# Allegro board SIX-lianxi - forstu.brd

Outline 67.6 x 42.35 mm; copper layers: TOP, ART03, GND04, PWR05, BOTTOM. Coordinates in mm from the lower left corner of the outline.
Outline path: 0,20.35 0.01,20.35 arc(2.01,22.35) 0.01,24.35 0.01,42.09 arc(0.08,42.27) 0.26,42.35 50.6,42.35 arc(50.78,42.27) 50.86,42.09 50.86,38.85 arc(51.35,38.35) 51.85,38.85 51.85,42.09 arc(51.93,42.27) 52.11,42.35 67.35,42.35 arc(67.53,42.27) 67.6,42.09 67.6,24.35 arc(65.61,22.41) 67.49,20.35 67.6,20.34 67.6,0.25 arc(67.53,0.07) 67.35,0 0.25,0 arc(0.07,0.07) 0,0.25 0,20.35

## Design rules (mm)
net group ADDR: nets DRAM_SDCLK0_N DRAM_SDCLK0_P
net group CLK1: nets CLK1_N CLK1_P
net group SD1_CLK: nets N98008264 SD1_CLK
net group SD2_CLK: nets N300600 SD2_CLK
net group SD2_CMD: nets N300873 SD2_CMD
net group SD2_NRST: nets N300588 SD2_NRST
net group USB_OTG1_D: nets USB_OTG1_DN USB_OTG1_DP
net group USB_OTG2_D: nets USB_OTG2_DN USB_OTG2_DP
net group DATA0-7: nets DRAM_DATA0 DRAM_DATA1 DRAM_DATA2 DRAM_DATA3 DRAM_DATA4 DRAM_DATA5 DRAM_DATA6 DRAM_DATA7 DRAM_DQM0

## Placement (name value [footprint] x y rotation side)
C1  22UF  [C0603]  34.33 18.6 90 bottom
C2  0.22uF  [C0402]  44.11 24.19 180 bottom
C3  0.22uF  [C0402]  44.87 25.58 0 bottom
C4  0.22uF  [C0402]  42.2 23.8 90 bottom
C5  0.22uF  [C0402]  42.2 25.84 90 bottom
C8  0.22uF  [C0402]  42.97 21.39 270 bottom
C9  0.22uF  [C0402]  46.27 23.42 90 bottom
C10  0.22uF  [C0402]  44.36 22.18 270 bottom
C13  0.22uF  [C0402]  46.27 25.46 270 bottom
C14  0.22uF  [C0402]  50.59 32.19 90 bottom
C16  0.22uF  [C0402]  50.71 27.23 0 bottom
C18  0.22uF  [C0402]  47.79 24.82 0 bottom
C19  0.22uF  [C0402]  53.33 24.34 0 bottom
C20  820pF  [C0402]  34.71 22.92 180 bottom
C21  18PF  [C0402]  34.71 20.38 0 bottom
C22  18PF  [C0402]  34.71 22.15 180 bottom
C23  0.22uF  [C0402]  40.43 23.8 90 bottom
C25  0.22uF  [C0402]  40.43 20.76 90 bottom
C26  1.0UF  [C0402]  54.5 26.9 0 top
C28  0.1uF  [C0402]  50.71 26.47 0 bottom
C29  1.0UF  [C0402]  54.5 26.14 0 top
C30  18PF  [C0402]  35.22 14.79 90 top
C31  18PF  [C0402]  34.2 14.79 90 top
C32  0.22uF  [C0402]  39.66 18.85 270 bottom
C33  18PF  [C0402]  38.78 32.69 270 bottom
C34  18PF  [C0402]  39.16 34.09 0 bottom
C35  0.22uF  [C0402]  44.87 26.47 0 bottom
C36  0.22uF  [C0402]  41.32 26.22 270 bottom
C37  0.1uF  [C0402]  46.52 27.36 180 bottom
C39  18PF  [C0402]  38.78 32.69 90 top
C40  18PF  [C0402]  39.16 34.09 180 top
C41  0.1uF  [C0402]  62.78 23.04 270 top
C42  0.1uF  [C0402]  58.84 23.04 90 top
C43  18PF  [C0402]  53.63 32.19 90 top
C44  18PF  [C0402]  55.13 22.26 90 top
C45  18PF  [C0402]  55.13 24.41 270 top
C46  18PF  [C0402]  50.43 34.42 180 top
C47  0.22uF  [C0402]  59.68 4.96 45 bottom
C48  0.22uF  [C0402]  55.29 14.28 45 top
C49  0.22uF  [C0402]  49.82 21.14 0 bottom
C50  0.22uF  [C0402]  48.45 14.66 270 top
C51  10uF  [C0603]  63.03 6.91 45 bottom
C55  0.22uF  [C0402]  41.32 22.15 90 bottom
C56  0.22uF  [C0402]  45.51 19.77 270 bottom
C57  0.22uF  [C0402]  46.55 21.16 0 bottom
C58  22UF  [C0603]  65.45 10.6 45 bottom
C59  0.22uF  [C0402]  62.02 7.55 45 bottom
C60  0.22uF  [C0402]  58.23 3.54 225 bottom
C61  0.22uF  [C0402]  53.94 9.53 225 bottom
C62  0.22uF  [C0402]  56.05 13.77 225 bottom
C63  0.22uF  [C0402]  63.54 9.07 225 bottom
C64  0.22uF  [C0402]  56.78 2.09 225 bottom
C65  0.22uF  [C0402]  51.48 9.07 45 bottom
C66  0.22uF  [C0402]  53 10.6 45 bottom
C67  0.22uF  [C0402]  57.57 15.3 225 bottom
C68  0.22uF  [C0402]  59.2 16.95 225 bottom
C69  0.22uF  [C0402]  58.59 7.29 45 bottom
C70  0.1uF  [C0402]  60.49 4.5 225 bottom
C71  4.7uF  [C0402]  61.76 3.23 225 bottom
C72  2.2pF  [C0402]  58.59 11.87 225 bottom
C74  0.1uF  [C0402]  58.97 2.98 225 bottom
C75  2.2pF  [C0402]  63.03 12.76 45 bottom
C77  4.7uF  [C0402]  21 19.36 90 bottom
C78  0.1uF  [C0402]  20.61 17.45 0 bottom
C80  0.1uF  [C0402]  21.5 21.39 180 bottom
C83  4.7uF  [C0402]  18.58 18.85 270 bottom
C84  0.1uF  [C0402]  23.54 20.88 270 bottom
C85  0.1uF  [C0402]  25.82 19.11 90 bottom
C86  0.1uF  [C0402]  25.82 17.07 90 bottom
C87  0.1uF  [C0402]  19.98 15.93 270 bottom
C88  1.0UF  [C0402]  20.87 15.93 270 bottom
C96  10uF  [C0603]  17.95 9.2 270 top
C97  0.1uF  [C0402]  18.96 9.58 270 top
C98  22UF  [C0603]  24.81 4.75 90 top
C99  10uF  [C0603]  16.69 9.19 270 top
C100  0.1uF  [C0402]  25.82 5.14 90 top
C101  0.1uF  [C0402]  25.44 9.71 0 top
C102  1000pF  [C0402]  25.95 7.29 90 top
C103  10uF  [C0603]  3.34 8.56 180 top
C104  0.1uF  [C0402]  3.72 9.58 180 top
C105  4.7uF  [C0402]  4.61 13.64 0 top
C106  0.1uF  [C0402]  4.61 14.41 0 top
C107  10uF  [C0603]  10.87 22.22 180 top
C108  10uF  [C0603]  10.89 20.96 180 top
C109  0.1uF  [C0402]  11.27 19.94 180 top
C110  22UF  [C0603]  3.72 19.87 0 top
C111  0.1uF  [C0402]  4.1 18.85 0 top
C112  10uF  [C0603]  3.09 5.52 270 top
C113  0.1uF  [C0402]  4.1 5.9 270 top
C114  4.7uF  [C0402]  9.82 5.77 270 top
C115  0.1uF  [C0402]  10.58 5.77 270 top
C116  0.22uF  [C0402]  8.68 19.11 270 top
C117  0.022UF  [C0402]  10.45 4.25 0 top
C118  1000pF  [C0402]  4.36 3.74 180 top
C119  0.1uF  [C0402]  8.68 17.07 90 top
C120  1000pF  [C0402]  10.12 25.63 270 top
C122  1000pF  [C0402]  11.72 11.23 180 top
C123  0.1uF  [C0402]  11.9 25.63 270 top
C130  1.0UF  [C0402]  9.06 10.22 180 top
C131  10uF  [C0603]  34.33 9.33 270 top
C132  10uF  [C0603]  35.6 9.33 270 top
C133  0.1uF  [C0402]  36.62 9.71 270 top
C134  22UF  [C0603]  42.59 4.88 90 top
C135  0.1uF  [C0402]  43.6 5.26 90 top
C140  0.1uF  [C0402]  43.22 9.83 0 top
C141  1000pF  [C0402]  43.73 7.42 90 top
C142  1.0UF  [C0402]  3.6 34.98 270 bottom
C143  0.1uF  [C0402]  4.36 34.98 270 bottom
C144  0.1uF  [C0402]  36.24 35.62 270 bottom
C145  1.0UF  [C0402]  35.47 35.62 270 bottom
C146  47uF  [C0805]  34.2 36.25 270 bottom
C148  0.1uF  [C0402]  36.24 35.62 270 top
C149  1.0UF  [C0402]  35.47 35.62 270 top
C150  22UF  [C0603]  34.46 36 270 top
C152  0.1uF  [C0402]  61.89 32.06 270 top
C154  0.1uF  [C0402]  62.78 32.06 270 top
C156  0.1uF  [C0402]  64.81 32.06 270 bottom
C158  0.1uF  [C0402]  64.05 32.06 270 bottom
C159  0.1uF  [C0402]  22.9 15.93 270 bottom
D1  RB521S30T1G  [SOD523]  52.85 26.01 90 bottom
D2  RB521S30T1G  [SOD523]  54.12 26.01 90 bottom
D3  RB521S-30  [SOD523]  11.72 12.37 180 top
D5  RB521S-30  [SOD523]  8.93 12.37 0 top
J1  SODIMM_EDGE FINGERS  [SODIMM-200PINS]  65.45 40.83 180 top
L1  1uH  [IND_4020]  18.33 5.26 0 top
L2  1uH  [IND_4020]  5.37 27.36 180 top
L3  1uH  [IND_4020]  35.98 5.39 0 top
NOREF  -  [unnamed]  65.6 36.35 0 top
NOREF#2  -  [unnamed]  2.01 36.35 0 top
Q1  RYU002N05  [SOT323-3]  55.49 31.98 90 bottom
Q2  RYU002N05  [SOT323-3]  30.52 7.17 0 bottom
Q3  2SK3018  [SOT323-3]  27.98 7.17 180 top
Q4  2SK3018  [SOT323-3]  30.52 7.17 180 top
Q5  2SK3018  [SOT323-3]  6.01 17.07 90 top
Q6  2SK3018  [SOT323-3]  6.01 17.07 270 bottom
Q8  2SK3018  [SOT323-3]  45.51 7.29 180 top
R1  1K  [R0402]  55.26 26.01 270 bottom
R2  0  [R0402]  34.71 24.19 180 top
R3  10  [R0402]  34.71 22.03 180 top
R4  10  [R0402]  34.71 23.04 180 top
R5  0  [R0402]  34.71 19.87 180 top
R6  10  [R0402]  34.71 21.26 180 bottom
R7  0  [R0402]  34.71 25.18 180 top
R9  10K  [R0402]  34.71 17.33 0 top
R10  10K  [R0402]  34.71 18.85 0 top
R11  10  [R0402]  34.71 16.31 180 top
R12  10  [R0402]  39.66 32.69 90 bottom
R13  10  [R0402]  39.66 32.69 90 top
R14  10K  [R0402]  47.67 32.19 90 bottom
R15  1.5K  [R0402]  63.67 23.04 90 top
R16  0/NC  [R0402]  60.75 23.04 90 top
R17  1K  [R0402]  59.73 23.04 270 top
R18  100K  [R0402]  53.33 23.45 0 bottom
R19  10K  [R0402]  49.7 32.19 90 bottom
R20  1K  [R0402]  50.71 32.19 270 top
R21  1M/NC  [R0402]  51.73 32.19 90 top
R22  499  [R0402]  49.7 32.16 270 top
R23  1M  [R0402]  56.56 32.19 270 top
R24  2.2M  [R0402]  54.52 32.19 90 top
R25  0/NC  [R0402]  52.75 32.19 90 top
R26  0  [R0402]  55.54 32.19 90 top
R27  0/NC  [R0402]  56.56 36.25 90 top
R28  0  [R0402]  56.56 34.22 270 top
R29  10K  [R0402]  44.64 14.58 270 bottom
R30  10K  [R0402]  46.65 14.66 270 bottom
R31  240  [R0402]  60.62 3.36 135 top
R32  240  [R0402]  61.38 4.12 315 top
R33  10K  [R0402]  41.65 17.76 180 bottom
R34  240  [R0402]  47.54 18.22 90 bottom
R35  470  [R0402]  55.92 7.04 315 bottom
R36  1.5K  [R0402]  61.13 3.87 225 bottom
R37  1.5K  [R0402]  59.6 2.34 225 bottom
R38  10K  [R0402]  21.88 15.93 270 bottom
R59  10K  [R0402]  22.14 31.81 270 top
R60  10K  [R0402]  24.17 35.23 270 top
R61  10K  [R0402]  25.19 35.23 270 top
R62  10K  [R0402]  20.11 31.81 270 top
R63  10K  [R0402]  21.12 31.81 270 top
R64  10K  [R0402]  22.14 35.23 270 top
R65  10K  [R0402]  23.15 35.23 270 top
R66  10K  [R0402]  18.07 31.81 270 top
R67  10K  [R0402]  19.09 31.81 270 top
R68  10K  [R0402]  20.11 35.23 270 top
R69  10K  [R0402]  21.12 35.23 270 top
R70  10K  [R0402]  16.04 31.81 270 top
R71  10K  [R0402]  17.06 31.81 270 top
R72  10K  [R0402]  15.03 31.81 270 top
R73  10K  [R0402]  18.07 35.23 270 top
R74  10K  [R0402]  19.09 35.23 270 top
R75  1K/NC  [R0402]  10.96 31.81 270 top
R76  1K/NC  [R0402]  16.04 35.23 270 top
R77  1K/NC  [R0402]  17.06 35.23 270 top
R78  1K  [R0402]  14.01 35.23 270 top
R79  10K  [R0402]  14.01 31.81 270 top
R80  10K  [R0402]  11.98 35.23 270 top
R81  10K  [R0402]  11.98 31.81 270 top
R82  1K/NC  [R0402]  15.03 35.23 270 top
R83  10K/NC  [R0402]  65.06 32.06 270 top
R84  10K/NC  [R0402]  64.05 32.06 270 top
R91  10K  [R0402]  15.03 35.23 90 bottom
R92  10K  [R0402]  11.98 31.81 90 bottom
R93  10K  [R0402]  11.98 35.23 90 bottom
R94  10K  [R0402]  14.01 31.81 90 bottom
R95  10K  [R0402]  14.01 35.23 90 bottom
R96  10K  [R0402]  17.06 35.23 90 bottom
R97  10K  [R0402]  16.04 35.23 90 bottom
R98  10K  [R0402]  10.96 31.81 90 bottom
R99  10K  [R0402]  19.09 35.23 90 bottom
R100  10K  [R0402]  18.07 35.23 90 bottom
R101  10K  [R0402]  15.03 31.81 90 bottom
R102  10K  [R0402]  17.06 31.81 90 bottom
R103  10K  [R0402]  16.04 31.81 90 bottom
R104  10K  [R0402]  21.12 35.23 90 bottom
R105  10K  [R0402]  20.11 35.23 90 bottom
R106  10K  [R0402]  19.09 31.81 90 bottom
R107  10K  [R0402]  18.07 31.81 90 bottom
R108  10K  [R0402]  23.15 35.23 90 bottom
R109  10K  [R0402]  22.14 35.23 90 bottom
R110  10K  [R0402]  21.12 31.81 90 bottom
R111  10K  [R0402]  20.11 31.81 90 bottom
R112  10K  [R0402]  25.19 35.23 90 bottom
R113  10K  [R0402]  24.17 35.23 90 bottom
R114  10K  [R0402]  22.14 31.81 90 bottom
R120  215K  [R0402]  24.93 7.29 90 top
R121  147K  [R0402]  27.73 4.12 270 top
R122  1.5M  [R0402]  28.74 4.12 270 top
R124  51  [R0402]  26.71 5.14 90 top
R127  10K  [R0402]  25.44 10.6 0 top
R129  160K  [R0402]  25.44 8.82 0 top
R130  100K/NC  [R0402]  30.14 4.12 270 bottom
R131  100K  [R0402]  30.14 4.12 270 top
R133  100K/NC  [R0402]  10.45 23.42 180 top
R134  180K  [R0402]  6.26 19.61 0 top
R135  51  [R0402]  4.1 17.96 0 top
R136  10K  [R0402]  9.57 19.11 270 top
R137  100K  [R0402]  4.1 19.11 0 bottom
R138  40.2K  [R0402]  7.79 19.11 270 top
R139  10K  [R0402]  4.1 17.96 0 bottom
R140  0  [R0402]  9.24 25.63 90 top
R141  0  [R0402]  10.33 13.64 180 top
R142  0/NC  [R0402]  11.01 25.63 270 top
R143  100  [R0402]  11.72 10.34 0 top
R144  1M  [R0402]  9.06 11.1 0 top
R146  200K  [R0402]  42.71 7.42 90 top
R149  51  [R0402]  44.49 5.26 90 top
R150  10K  [R0402]  43.22 10.72 0 top
R151  160K  [R0402]  43.22 8.95 0 top
TP12  TP_35MIL  [TESTPOINT40MIL]  20.74 10.47 180 bottom
TP19  TP_35MIL  [TESTPOINT40MIL]  38.52 10.22 180 bottom
U1  IMX6UL  [BGA289]  44.11 23.8 90 top
U2  UM803RS  [SOT-23]  61.89 24.95 180 top
U3  MT41K256M16HA-125:E  [BGA96]  58.08 9.58 315 top
U4  MTFC8GACAAAM  [FBGA153]  21.12 19.87 90 top
U7  MP2159GJ  [TSOT23_8]  22.14 9.45 0 top
U8  RT9169-33GVL  [RT9169_SOT23-3]  5.12 11.23 180 top
U9  MP2144GJ  [TSOT23_8]  7.2 22.61 270 top
U10  RT9193  [SOT23-5]  7.41 5.39 270 top
U11  UM805RE  [SOT_143]  11.09 16.06 270 top
U13  MP2159GJ  [TSOT23_8]  39.79 9.58 0 top
Y1  24MHZ  [XTLOSC4]  53.91 35.54 0 top
Y2  32.768kHz  [XTAL2]  56.91 23.4 90 top

## Library data of the parts
C1 = CAP_NP_4
C2-C5 C8-C10 C13 C14 C16 C18-C23 C25 C26 C28-C37 C39-C51 C55-C72 C74 C75 C77 C78 C80 C83-C88 C96-C120 C122 C123 C130-C135 C140-C146 C148-C150 C152 C154 C156 C158 C159 = CAP_NP_3
D1-D3 D5 = DIODE_SCHTKY_2
J1 = SODIMM_1
L1-L3 = IND_0: tolerance: 30%
Q1-Q6 Q8 = 2SK3018_0
R1 R2 R4 R7 R9 R10 R12 R13 R15-R18 R20-R37 R75-R78 R82 R120-R122 R124 R127 R129-R131 R133-R144 R146 R149-R151 = RES_1
R3 R6 R11 = RES_1: signal model: RES_1_R0402_10_10
R5 = RES_1: signal model: RES_1_R0402_0_0
R14 R19 R38 R59-R74 R79-R81 R83 R84 R91-R114 = RES_1: tolerance: 5%
TP12 TP19 = T POINT R_0
U1 = IMX6UL_2
U2 = SOT23-3P_0
U3 = 4G_DDR3_SDRAM_256MX16_1
U4 = MTFC4GMVEA_WFBGA_0
U7 = MP2159GJ_3
U8 = RT9169_1
U9 = MP2144GJ_TSOT23_0
U10 = RT9193-33PB_0
U11 = UM805_1
U13 = MP2159GJ_4
Y1 = CRYSTAL_0
Y2 = XTAL_0

## Footprints (pads in the part's own frame, mm; a bottom-side part is the same pattern mirrored in y, then rotated)
BGA96
  round 0.356 smd: A1(-3.2,5.999) A2(-2.4,5.999) A3(-1.6,5.999) A7(1.6,5.999) A8(2.4,5.999) A9(3.2,5.999) B1(-3.2,5.199) B2(-2.4,5.199) B3(-1.6,5.199) B7(1.6,5.199) B8(2.4,5.199) B9(3.2,5.199) C1(-3.2,4.399) C2(-2.4,4.399) C3(-1.6,4.399) C7(1.6,4.399) C8(2.4,4.399) C9(3.2,4.399) D1(-3.2,3.599) D2(-2.4,3.599) D3(-1.6,3.599) D7(1.6,3.599) D8(2.4,3.599) D9(3.2,3.599) E1(-3.2,2.799) E2(-2.4,2.799) E3(-1.6,2.799) E7(1.6,2.799) E8(2.4,2.799) E9(3.2,2.799) F1(-3.2,1.999) F2(-2.4,1.999) F3(-1.6,1.999) F7(1.6,1.999) F8(2.4,1.999) F9(3.2,1.999) G1(-3.2,1.199) G2(-2.4,1.199) G3(-1.6,1.199) G7(1.6,1.199) G8(2.4,1.199) G9(3.2,1.199) H1(-3.2,0.401) H2(-2.4,0.401) H3(-1.6,0.401) H7(1.6,0.401) H8(2.4,0.401) H9(3.2,0.401) J1(-3.2,-0.401) J2(-2.4,-0.401) J3(-1.6,-0.401) J7(1.6,-0.401) J8(2.4,-0.401) J9(3.2,-0.401) K1(-3.2,-1.199) K2(-2.4,-1.199) K3(-1.6,-1.199) K7(1.6,-1.199) K8(2.4,-1.199) K9(3.2,-1.199) L1(-3.2,-1.999) L2(-2.4,-1.999) L3(-1.6,-1.999) L7(1.6,-1.999) L8(2.4,-1.999) L9(3.2,-1.999) M1(-3.2,-2.799) M2(-2.4,-2.799) M3(-1.6,-2.799) M7(1.6,-2.799) M8(2.4,-2.799) M9(3.2,-2.799) N1(-3.2,-3.599) N2(-2.4,-3.599) N3(-1.6,-3.599) N7(1.6,-3.599) N8(2.4,-3.599) N9(3.2,-3.599) P1(-3.2,-4.399) P2(-2.4,-4.399) P3(-1.6,-4.399) P7(1.6,-4.399) P8(2.4,-4.399) P9(3.2,-4.399) R1(-3.2,-5.199) R2(-2.4,-5.199) R3(-1.6,-5.199) R7(1.6,-5.199) R8(2.4,-5.199) R9(3.2,-5.199) T1(-3.2,-5.999) T2(-2.4,-5.999) T3(-1.6,-5.999) T7(1.6,-5.999) T8(2.4,-5.999) T9(3.2,-5.999)
BGA289
  round 0.305 smd: A1(-6.401,6.401) A2(-5.601,6.401) A3(-4.801,6.401) A4(-4,6.401) A5(-3.2,6.401) A6(-2.4,6.401) A7(-1.6,6.401) A8(-0.8,6.401) A9(0,6.401) A10(0.8,6.401) A11(1.6,6.401) A12(2.4,6.401) A13(3.2,6.401) A14(4,6.401) A15(4.801,6.401) A16(5.601,6.401) A17(6.401,6.401) B1(-6.401,5.601) B2(-5.601,5.601) B3(-4.801,5.601) B4(-4,5.601) B5(-3.2,5.601) B6(-2.4,5.601) B7(-1.6,5.601) B8(-0.8,5.601) B9(0,5.601) B10(0.8,5.601) B11(1.6,5.601) B12(2.4,5.601) B13(3.2,5.601) B14(4,5.601) B15(4.801,5.601) B16(5.601,5.601) B17(6.401,5.601) C1(-6.401,4.801) C2(-5.601,4.801) C3(-4.801,4.801) C4(-4,4.801) C5(-3.2,4.801) C6(-2.4,4.801) C7(-1.6,4.801) C8(-0.8,4.801) C9(0,4.801) C10(0.8,4.801) C11(1.6,4.801) C12(2.4,4.801) C13(3.2,4.801) C14(4,4.801) C15(4.801,4.801) C16(5.601,4.801) C17(6.401,4.801) D1(-6.401,4) D2(-5.601,4) D3(-4.801,4) D4(-4,4) D5(-3.2,4) D6(-2.4,4) D7(-1.6,4) D8(-0.8,4) D9(0,4) D10(0.8,4) D11(1.6,4) D12(2.4,4) D13(3.2,4) D14(4,4) D15(4.801,4) D16(5.601,4) D17(6.401,4) E1(-6.401,3.2) E2(-5.601,3.2) E3(-4.801,3.2) E4(-4,3.2) E5(-3.2,3.2) E6(-2.4,3.2) E7(-1.6,3.2) E8(-0.8,3.2) E9(0,3.2) E10(0.8,3.2) E11(1.6,3.2) E12(2.4,3.2) E13(3.2,3.2) E14(4,3.2) E15(4.801,3.2) E16(5.601,3.2) E17(6.401,3.2) F1(-6.401,2.4) F2(-5.601,2.4) F3(-4.801,2.4) F4(-4,2.4) F5(-3.2,2.4) F6(-2.4,2.4) F7(-1.6,2.4) F8(-0.8,2.4) F9(0,2.4) F10(0.8,2.4) F11(1.6,2.4) F12(2.4,2.4) F13(3.2,2.4) F14(4,2.4) F15(4.801,2.4) F16(5.601,2.4) F17(6.401,2.4) G1(-6.401,1.6) G2(-5.601,1.6) G3(-4.801,1.6) G4(-4,1.6) G5(-3.2,1.6) G6(-2.4,1.6) G7(-1.6,1.6) G8(-0.8,1.6) G9(0,1.6) G10(0.8,1.6) G11(1.6,1.6) G12(2.4,1.6) G13(3.2,1.6) G14(4,1.6) G15(4.801,1.6) G16(5.601,1.6) G17(6.401,1.6) H1(-6.401,0.8) H2(-5.601,0.8) H3(-4.801,0.8) H4(-4,0.8) H5(-3.2,0.8) H6(-2.4,0.8) H7(-1.6,0.8) H8(-0.8,0.8) H9(0,0.8) H10(0.8,0.8) H11(1.6,0.8) H12(2.4,0.8) H13(3.2,0.8) H14(4,0.8) H15(4.801,0.8) H16(5.601,0.8) H17(6.401,0.8) J1(-6.401,0) J2(-5.601,0) J3(-4.801,0) J4(-4,0) J5(-3.2,0) J6(-2.4,0) J7(-1.6,0) J8(-0.8,0) J9(0,0) J10(0.8,0) J11(1.6,0) J12(2.4,0) J13(3.2,0) J14(4,0) J15(4.801,0) J16(5.601,0) J17(6.401,0) K1(-6.401,-0.8) K2(-5.601,-0.8) K3(-4.801,-0.8) K4(-4,-0.8) K5(-3.2,-0.8) K6(-2.4,-0.8) K7(-1.6,-0.8) K8(-0.8,-0.8) K9(0,-0.8) K10(0.8,-0.8) K11(1.6,-0.8) K12(2.4,-0.8) K13(3.2,-0.8) K14(4,-0.8) K15(4.801,-0.8) K16(5.601,-0.8) K17(6.401,-0.8) L1(-6.401,-1.6) L2(-5.601,-1.6) L3(-4.801,-1.6) L4(-4,-1.6) L5(-3.2,-1.6) L6(-2.4,-1.6) L7(-1.6,-1.6) L8(-0.8,-1.6) L9(0,-1.6) L10(0.8,-1.6) L11(1.6,-1.6) L12(2.4,-1.6) L13(3.2,-1.6) L14(4,-1.6) L15(4.801,-1.6) L16(5.601,-1.6) L17(6.401,-1.6) M1(-6.401,-2.4) M2(-5.601,-2.4) M3(-4.801,-2.4) M4(-4,-2.4) M5(-3.2,-2.4) M6(-2.4,-2.4) M7(-1.6,-2.4) M8(-0.8,-2.4) M9(0,-2.4) M10(0.8,-2.4) M11(1.6,-2.4) M12(2.4,-2.4) M13(3.2,-2.4) M14(4,-2.4) M15(4.801,-2.4) M16(5.601,-2.4) M17(6.401,-2.4) N1(-6.401,-3.2) N2(-5.601,-3.2) N3(-4.801,-3.2) N4(-4,-3.2) N5(-3.2,-3.2) N6(-2.4,-3.2) N7(-1.6,-3.2) N8(-0.8,-3.2) N9(0,-3.2) N10(0.8,-3.2) N11(1.6,-3.2) N12(2.4,-3.2) N13(3.2,-3.2) N14(4,-3.2) N15(4.801,-3.2) N16(5.601,-3.2) N17(6.401,-3.2) P1(-6.401,-4) P2(-5.601,-4) P3(-4.801,-4) P4(-4,-4) P5(-3.2,-4) P6(-2.4,-4) P7(-1.6,-4) P8(-0.8,-4) P9(0,-4) P10(0.8,-4) P11(1.6,-4) P12(2.4,-4) P13(3.2,-4) P14(4,-4) P15(4.801,-4) P16(5.601,-4) P17(6.401,-4) R1(-6.401,-4.801) R2(-5.601,-4.801) R3(-4.801,-4.801) R4(-4,-4.801) R5(-3.2,-4.801) R6(-2.4,-4.801) R7(-1.6,-4.801) R8(-0.8,-4.801) R9(0,-4.801) R10(0.8,-4.801) R11(1.6,-4.801) R12(2.4,-4.801) R13(3.2,-4.801) R14(4,-4.801) R15(4.801,-4.801) R16(5.601,-4.801) R17(6.401,-4.801) T1(-6.401,-5.601) T2(-5.601,-5.601) T3(-4.801,-5.601) T4(-4,-5.601) T5(-3.2,-5.601) T6(-2.4,-5.601) T7(-1.6,-5.601) T8(-0.8,-5.601) T9(0,-5.601) T10(0.8,-5.601) T11(1.6,-5.601) T12(2.4,-5.601) T13(3.2,-5.601) T14(4,-5.601) T15(4.801,-5.601) T16(5.601,-5.601) T17(6.401,-5.601) U1(-6.401,-6.401) U2(-5.601,-6.401) U3(-4.801,-6.401) U4(-4,-6.401) U5(-3.2,-6.401) U6(-2.4,-6.401) U7(-1.6,-6.401) U8(-0.8,-6.401) U9(0,-6.401) U10(0.8,-6.401) U11(1.6,-6.401) U12(2.4,-6.401) U13(3.2,-6.401) U14(4,-6.401) U15(4.801,-6.401) U16(5.601,-6.401) U17(6.401,-6.401)
C0402
  rect 0.635x0.508 smd: 1(-0.508,0) 2(0.508,0)
C0603
  rect 0.889x0.813 smd: 1(-0.762,0) 2(0.762,0)
C0805
  rect 1.143x1.27 smd: 1(-0.889,0) 2(0.889,0)
FBGA153
  round 0.254 smd: A1(-3.251,3.251) A2(-2.751,3.251) A3(-2.25,3.251) A4(-1.75,3.251) A5(-1.25,3.251) A6(-0.749,3.251) A7(-0.249,3.251) A8(0.249,3.251) A9(0.749,3.251) A10(1.25,3.251) A11(1.75,3.251) A12(2.25,3.251) A13(2.751,3.251) A14(3.251,3.251) B1(-3.251,2.751) B2(-2.751,2.751) B3(-2.25,2.751) B4(-1.75,2.751) B5(-1.25,2.751) B6(-0.749,2.751) B7(-0.249,2.751) B8(0.249,2.751) B9(0.749,2.751) B10(1.25,2.751) B11(1.75,2.751) B12(2.25,2.751) B13(2.751,2.751) B14(3.251,2.751) C1(-3.251,2.25) C2(-2.751,2.25) C3(-2.25,2.25) C4(-1.75,2.25) C5(-1.25,2.25) C6(-0.749,2.25) C7(-0.249,2.25) C8(0.249,2.25) C9(0.749,2.25) C10(1.25,2.25) C11(1.75,2.25) C12(2.25,2.25) C13(2.751,2.25) C14(3.251,2.25) D1(-3.251,1.75) D2(-2.751,1.75) D3(-2.25,1.75) D4(-1.75,1.75) D12(2.25,1.75) D13(2.751,1.75) D14(3.251,1.75) E1(-3.251,1.25) E2(-2.751,1.25) E3(-2.25,1.25) E5(-1.25,1.25) E6(-0.749,1.25) E7(-0.249,1.25) E8(0.249,1.25) E9(0.749,1.25) E10(1.25,1.25) E12(2.25,1.25) E13(2.751,1.25) E14(3.251,1.25) F1(-3.251,0.749) F2(-2.751,0.749) F3(-2.25,0.749) F5(-1.25,0.749) F10(1.25,0.749) F12(2.25,0.749) F13(2.751,0.749) F14(3.251,0.749) G1(-3.251,0.249) G2(-2.751,0.249) G3(-2.25,0.249) G5(-1.25,0.249) G10(1.25,0.249) G12(2.25,0.249) G13(2.751,0.249) G14(3.251,0.249) H1(-3.251,-0.249) H2(-2.751,-0.249) H3(-2.25,-0.249) H5(-1.25,-0.249) H10(1.25,-0.249) H12(2.25,-0.249) H13(2.751,-0.249) H14(3.251,-0.249) J1(-3.251,-0.749) J2(-2.751,-0.749) J3(-2.25,-0.749) J5(-1.25,-0.749) J10(1.25,-0.749) J12(2.25,-0.749) J13(2.751,-0.749) J14(3.251,-0.749) K1(-3.251,-1.25) K2(-2.751,-1.25) K3(-2.25,-1.25) K5(-1.25,-1.25) K6(-0.749,-1.25) K7(-0.249,-1.25) K8(0.249,-1.25) K9(0.749,-1.25) K10(1.25,-1.25) K12(2.25,-1.25) K13(2.751,-1.25) K14(3.251,-1.25) L1(-3.251,-1.75) L2(-2.751,-1.75) L3(-2.25,-1.75) L12(2.25,-1.75) L13(2.751,-1.75) L14(3.251,-1.75) M1(-3.251,-2.25) M2(-2.751,-2.25) M3(-2.25,-2.25) M4(-1.75,-2.25) M5(-1.25,-2.25) M6(-0.749,-2.25) M7(-0.249,-2.25) M8(0.249,-2.25) M9(0.749,-2.25) M10(1.25,-2.25) M11(1.75,-2.25) M12(2.25,-2.25) M13(2.751,-2.25) M14(3.251,-2.25) N1(-3.251,-2.751) N2(-2.751,-2.751) N3(-2.25,-2.751) N4(-1.75,-2.751) N5(-1.25,-2.751) N6(-0.749,-2.751) N7(-0.249,-2.751) N8(0.249,-2.751) N9(0.749,-2.751) N10(1.25,-2.751) N11(1.75,-2.751) N12(2.25,-2.751) N13(2.751,-2.751) N14(3.251,-2.751) P1(-3.251,-3.251) P2(-2.751,-3.251) P3(-2.25,-3.251) P4(-1.75,-3.251) P5(-1.25,-3.251) P6(-0.749,-3.251) P7(-0.249,-3.251) P8(0.249,-3.251) P9(0.749,-3.251) P10(1.25,-3.251) P11(1.75,-3.251) P12(2.25,-3.251) P13(2.751,-3.251) P14(3.251,-3.251)
IND_4020
  rect 1.118x3.708 smd: 1(-1.501,0) 2(1.501,0)
R0402
  rect 0.635x0.508 smd: 1(-0.508,0) 2(0.508,0)
RT9169_SOT23-3
  rect 0.584x1.194 smd: 1(-0.953,-1.25) 2(0.953,-1.25) 3(0,1.25)
SOD523
  rect 0.61x0.813 smd: 1(-0.851,0) 2(0.851,0)
SODIMM-200PINS
  rect 0.457x2.54 smd: 1(0,0) 2(0.3,0) 3(0.599,0) 4(0.899,0) 5(1.199,0) 6(1.499,0) 7(1.798,0) 8(2.098,0) 9(2.398,0) 10(2.7,0) 11(3,0) 12(3.299,0) 13(3.599,0) 14(3.899,0) 15(4.199,0) 16(4.498,0) 17(4.798,0) 18(5.098,0) 19(5.397,0) 20(5.7,0) 21(5.999,0) 22(6.299,0) 23(6.599,0) 24(6.899,0) 25(7.198,0) 26(7.498,0) 27(7.798,0) 28(8.098,0) 29(8.397,0) 30(8.7,0) 31(8.999,0) 32(9.299,0) 33(9.599,0) 34(9.898,0) 35(10.198,0) 36(10.498,0) 37(10.798,0) 38(11.097,0) 39(11.397,0) 40(11.699,0) 41(15.598,0) 42(15.898,0) 43(16.198,0) 44(16.497,0) 45(16.797,0) 46(17.097,0) 47(17.399,0) 48(17.699,0) 49(17.998,0) 50(18.298,0) 51(18.598,0) 52(18.898,0) 53(19.197,0) 54(19.497,0) 55(19.797,0) 56(20.096,0) 57(20.399,0) 58(20.698,0) 59(20.998,0) 60(21.298,0) 61(21.598,0) 62(21.897,0) 63(22.197,0) 64(22.497,0) 65(22.797,0) 66(23.096,0) 67(23.398,0) 68(23.698,0) 69(23.998,0) 70(24.298,0) 71(24.597,0) 72(24.897,0) 73(25.197,0) 74(25.497,0) 75(25.796,0) 76(26.096,0) 77(26.398,0) 78(26.698,0) 79(26.998,0) 80(27.297,0) 81(27.597,0) 82(27.897,0) 83(28.197,0) 84(28.496,0) 85(28.796,0) 86(29.096,0) 87(29.398,0) 88(29.698,0) 89(29.997,0) 90(30.297,0) 91(30.597,0) 92(30.897,0) 93(31.196,0) 94(31.496,0) 95(31.796,0) 96(32.098,0) 97(32.398,0) 98(32.697,0) 99(32.997,0) 100(33.297,0) 101(33.597,0) 102(33.896,0) 103(34.196,0) 104(34.496,0) 105(34.795,0) 106(35.098,0) 107(35.397,0) 108(35.697,0) 109(35.997,0) 110(36.297,0) 111(36.596,0) 112(36.896,0) 113(37.196,0) 114(37.495,0) 115(37.795,0) 116(38.097,0) 117(38.397,0) 118(38.697,0) 119(38.997,0) 120(39.296,0) 121(39.596,0) 122(39.896,0) 123(40.196,0) 124(40.495,0) 125(40.795,0) 126(41.097,0) 127(41.397,0) 128(41.697,0) 129(41.996,0) 130(42.296,0) 131(42.596,0) 132(42.896,0) 133(43.195,0) 134(43.495,0) 135(43.795,0) 136(44.097,0) 137(44.397,0) 138(44.696,0) 139(44.996,0) 140(45.296,0) 141(45.596,0) 142(45.895,0) 143(46.195,0) 144(46.495,0) 145(46.794,0) 146(47.097,0) 147(47.396,0) 148(47.696,0) 149(47.996,0) 150(48.296,0) 151(48.595,0) 152(48.895,0) 153(49.195,0) 154(49.494,0) 155(49.794,0) 156(50.096,0) 157(50.396,0) 158(50.696,0) 159(50.996,0) 160(51.295,0) 161(51.595,0) 162(51.895,0) 163(52.194,0) 164(52.494,0) 165(52.794,0) 166(53.096,0) 167(53.396,0) 168(53.696,0) 169(53.995,0) 170(54.295,0) 171(54.595,0) 172(54.894,0) 173(55.194,0) 174(55.494,0) 175(55.794,0) 176(56.096,0) 177(56.396,0) 178(56.695,0) 179(56.995,0) 180(57.295,0) 181(57.594,0) 182(57.894,0) 183(58.194,0) 184(58.494,0) 185(58.793,0) 186(59.096,0) 187(59.395,0) 188(59.695,0) 189(59.995,0) 190(60.295,0) 191(60.594,0) 192(60.894,0) 193(61.194,0) 194(61.493,0) 195(61.793,0) 196(62.095,0) 197(62.395,0) 198(62.695,0) 199(62.995,0) 200(63.294,0)
SOT23-5
  rect 0.635x1.397 smd: 1(-0.95,-1.199) 2(0,-1.199) 3(0.95,-1.199) 4(0.95,1.199) 5(-0.95,1.199)
SOT323-3
  rect 0.406x0.991 smd: 1(0.65,-1.059) 2(-0.65,-1.059) 3(0,1.059)
SOT-23
  rect 0.851x1.001 smd: 1(-0.95,-1.001) 2(0.95,-1.001) 3(0,1.001)
SOT_143
  rect 1.219x1.397 smd: 1(-0.749,-1.1)
  rect 1.016x1.397 smd: 2(0.95,-1.1) 3(0.95,1.1) 4(-0.95,1.1)
TESTPOINT40MIL
  round 1.016 smd: 1(0,0)
TSOT23_8
  rect 1.219x0.432 smd: 1(-1.311,0.975) 2(-1.311,0.325) 3(-1.311,-0.325) 4(-1.311,-0.975) 5(1.311,-0.975) 6(1.311,-0.325) 7(1.311,0.325) 8(1.311,0.975)
unnamed
  round 1.801 hole 1.801: (0,0)
XTAL2
  rect 1.092x1.905 smd: 1(-1.25,0) 2(1.25,0)
XTLOSC4
  rect 1.397x1.194 smd: 1(-1.1,-0.8) 2(1.1,-0.8) 3(1.1,0.8) 4(-1.1,0.8)

## Nets
GND: C1.2 C2.2 C3.2 C4.2 C5.2 C8.2 C9.2 C10.2 C13.2 C14.2 C16.2 C18.2 C19.2 C20.1 C21.1 C22.1 C23.2 C25.2 C26.2 C28.2 C29.2 C30.1 C31.1 C32.2 C33.1 C34.1 C35.2 C36.2 C37.2 C39.2 C40.2 C41.2 C42.2 C43.2 C44.2 C45.2 C46.2 C47.2 C48.2 C49.2 C50.2 C51.2 C55.2 C56.2 C57.2 C58.2 C59.2 C60.2 C61.2 C62.2 C63.2 C64.2 C65.2 C66.2 C67.2 C68.2 C69.2 C71.2 C74.2 C77.2 C78.2 C80.2 C83.2 C84.2 C85.2 C86.2 C87.2 C88.2 C96.2 C97.2 C98.2 C99.2 C100.2 C101.2 C102.2 C103.2 C104.2 C105.2 C106.2 C107.2 C108.2 C109.2 C110.2 C111.2 C112.2 C113.2 C114.2 C115.2 C116.2 C117.2 C118.2 C119.2 C120.2 C122.2 C123.2 C131.2 C132.2 C133.2 C134.2 C135.2 C140.2 C141.2 C142.2 C143.2 C144.2 C145.2 C146.2 C148.2 C149.2 C150.2 C152.2 C154.2 C156.2 C158.2 C159.2 J1.1 J1.2 J1.15 J1.17 J1.20 J1.22 J1.23 J1.26 J1.28 J1.29 J1.35 J1.38 J1.40 J1.41 J1.50 J1.51 J1.59 J1.60 J1.70 J1.71 J1.81 J1.82 J1.84 J1.103 J1.107 J1.115 J1.116 J1.120 J1.125 J1.127 J1.128 J1.130 J1.132 J1.135 J1.136 J1.146 J1.147 J1.156 J1.159 J1.165 J1.168 J1.170 J1.172 J1.174 J1.176 J1.177 J1.178 J1.180 J1.181 J1.182 J1.184 J1.185 J1.189 J1.199 J1.200 Q1.1(SOURCE) Q3.1(SOURCE) Q5.1(SOURCE) Q6.1(SOURCE) Q8.1(SOURCE) R14.2 R19.2 R22.1 R24.2 R27.2 R29.2 R30.2 R31.1 R32.2 R33.1 R34.1 R37.2 R38.2 R91.1 R92.1 R93.1 R94.1 R95.1 R96.1 R97.1 R98.1 R99.1 R100.1 R101.1 R102.1 R103.1 R104.1 R105.1 R106.1 R107.1 R108.1 R109.1 R110.1 R111.1 R112.1 R113.1 R114.1 R129.2 R130.2 R131.2 R138.2 R144.2 R151.2 U1.A1(VSS1) U1.A17(VSS2) U1.C3(VSS3) U1.C7(VSS4) U1.C11(VSS5) U1.C15(VSS6) U1.E8(VSS7) U1.E11(VSS8) U1.F6(VSS9) U1.F7(VSS10) U1.F8(VSS11) U1.F9(VSS12) U1.F10(VSS13) U1.F11(VSS14) U1.F12(VSS15) U1.G3(VSS16) U1.G5(VSS17) U1.G7(VSS18) U1.G12(VSS19) U1.G15(VSS20) U1.H7(VSS21) U1.H12(VSS22) U1.J5(VSS23) U1.J7(VSS24) U1.J12(VSS25) U1.K7(VSS26) U1.K12(VSS27) U1.L3(VSS28) U1.L7(VSS29) U1.L12(VSS30) U1.M7(VSS31) U1.M8(VSS32) U1.M9(VSS33) U1.M10(VSS34) U1.M11(VSS35) U1.M12(NGND_KEL0) U1.N3(VSS36) U1.N5(VSS37) U1.N7(TEST_MODE) U1.R3(VSS38) U1.R5(VSS39) U1.R7(VSS40) U1.R11(VSS41) U1.R16(VSS42) U1.R17(VSS43) U1.T14(VSS44) U1.U1(VSS45) U1.U14(VSS46) U1.U17(VSS47) U2.1(GND) U3.A9(VSS1) U3.B1(VSSQ1) U3.B3(VSS2) U3.B9(VSSQ2) U3.D1(VSSQ3) U3.D8(VSSQ4) U3.E1(VSS3) U3.E2(VSSQ5) U3.E8(VSSQ6) U3.F9(VSSQ7) U3.G1(VSSQ8) U3.G8(VSS4) U3.G9(VSSQ9) U3.J2(VSS5) U3.J8(VSS6) U3.M1(VSS7) U3.M9(VSS8) U3.P1(VSS9) U3.P9(VSS10) U3.T1(VSS11) U3.T9(VSS12) U4.C4(VSSQ5) U4.E7(VSS1) U4.G5(VSS2) U4.H10(VSS3) U4.K8(VSS4) U4.N2(VSSQ1) U4.N5(VSSQ2) U4.P4(VSSQ3) U4.P6(VSSQ4) U7.4(PGND) U7.6(AGND) U8.1(GND) U9.4(PGND) U9.6(AGND) U10.2(GND) U11.1(GND) U13.4(PGND) U13.6(AGND) Y1.4(GND2)
VDD_ARM_CAP: C4.1 C5.1 U1.G9(VDD_ARM_CAP1) U1.G10(VDD_ARM_CAP2) U1.G11(VDD_ARM_CAP3) U1.H11(VDD_ARM_CAP4)
VDD_ARM_SOC_IN: C1.1 C2.1 C3.1 C98.1 C100.1 L1.2 R120.1 R121.1 R122.1 R124.1 U1.H9(VDD_SOC_IN1) U1.H10(VDD_SOC_IN2) U1.J9(VDD_SOC_IN3) U1.J10(VDD_SOC_IN4) U1.K9(VDD_SOC_IN5) U1.K10(VDD_SOC_IN6) U7.5(OUT)
VDD_COIN_3V: C158.1 D2.2 J1.8 R1.1
VDD_HIGH_CAP: C14.1 C49.1 U1.N6(NVCC_DRAM_2P5) U1.R14(VDD_HIGH_CAP1) U1.R15(VDD_HIGH_CAP2)
VDD_SNVS_3V3: C105.1 C106.1 C123.1 D1.2 R137.1 U8.2(VOUT) U11.4(VCC)
VDD_SNVS_IN: C19.1 C156.1 D1.1 D2.1 J1.6 R1.2 R18.1 R83.2 R84.2 U1.P12(VDD_SNVS_IN)
VDD_SOC_CAP: C8.1 C9.1 C10.1 U1.G8(VDD_SOC_CAP1) U1.H8(VDD_SOC_CAP2) U1.J8(VDD_SOC_CAP3) U1.J11(VDD_SOC_CAP4) U1.K8(VDD_SOC_CAP5) U1.K11(VDD_SOC_CAP6) U1.L8(VDD_SOC_CAP7) U1.L9(VDD_SOC_CAP8) U1.L10(VDD_SOC_CAP9) U1.L11(VDD_SOC_CAP10)
VDDA_ADC_3P3: C37.1 C114.1 C115.1 U1.L13(VDDA_ADC_3P3) U1.M13(ADC_VREFH) U10.5(VOUT)
ACC_INT: J1.36 U1.R10(SNVS_TAMPER0)
ARM_SOC_PG: TP12.1(TP) U7.1(PG)
AUD_INT: J1.30 U1.P9(SNVS_TAMPER4)
BLT_PWM: J1.45 U1.N17(GPIO1_IO08)
BT_DISABLE: J1.32 U1.R9(SNVS_TAMPER1)
CAN1_RX: J1.80 U1.G14(U\A\R\T\3\_\R\T\S\)
CAN1_TX: J1.76 U1.H15(U\A\R\T\3\_\C\T\S\)
CAN2_RX: J1.78 U1.H14(U\A\R\T\2\_\R\T\S\)
CAN2_TX: J1.72 U1.J15(U\A\R\T\2\_\C\T\S\)
CLK1_N: J1.37 U1.P16(CCM_CLK1_N)
CLK1_P: J1.39 U1.P17(CCM_CLK1_P)
CSI_DATA0: J1.195 U1.E4(CSI_DATA00)
CSI_DATA1: J1.193 U1.E3(CSI_DATA01)
CSI_DATA2: J1.194 U1.E2(CSI_DATA02)
CSI_DATA3: J1.192 U1.E1(CSI_DATA03)
CSI_DATA4: J1.191 U1.D4(CSI_DATA04)
CSI_DATA5: J1.190 U1.D3(CSI_DATA05)
CSI_DATA6: J1.186 U1.D2(CSI_DATA06)
CSI_DATA7: J1.188 U1.D1(CSI_DATA07)
CSI_HSYNC: J1.197 U1.F3(CSI_HSYNC)
CSI_MCLK: J1.187 U1.F5(CSI_MCLK)
CSI_PIXCLK: J1.183 U1.E5(CSI_PIXCLK)
CSI_VSYNC: J1.198 U1.F2(CSI_VSYNC)
DCDC_3V3: C13.1 C23.1 C25.1 C32.1 C35.1 C36.1 C77.1 C78.1 C80.1 C83.1 C84.1 C85.1 C86.1 C110.1 C111.1 C142.1 C143.1 C148.1 C149.1 C150.1 C159.1 J1.85 J1.87 J1.88 J1.89 J1.90 J1.91 J1.92 J1.93 J1.196 L2.2 R9.1 R10.1 R15.1 R23.1 R28.2 R59.2 R60.2 R61.2 R62.2 R63.2 R64.2 R65.2 R66.2 R67.2 R68.2 R69.2 R70.2 R71.2 R72.2 R73.2 R74.2 R75.2 R76.2 R77.2 R78.2 R79.2 R80.2 R81.2 R82.2 R134.1 R135.1 R142.2 U1.C4(NVCC_SD1) U1.E7(NVCC_NAND) U1.E13(NVCC_LCD) U1.F4(NVCC_CSI) U1.F13(NVCC_ENET) U1.H13(NVCC_UART) U1.J13(NVCC_GPIO) U1.N13(VDD_HIGH_IN) U4.C6(VCCQ1) U4.E6(VCC3) U4.F5(VCC2) U4.J10(VCC1) U4.K9(VCC4) U4.M4(VCCQ3) U4.N4(VCCQ5) U4.P3(VCCQ4) U4.P5(VCCQ2) U9.5(OUT)
DCDC_3V3_PG: C118.1 C120.1 R127.2 R140.2 R142.1 R150.2 U10.3(EN)
DISCHG_EN: C102.1 C119.1 C141.1 Q3.2(GATE) Q5.2(GATE) Q8.2(GATE) R139.1
DRAM_1V35: C51.1 C55.1 C56.1 C57.1 C58.1 C59.1 C60.1 C61.1 C62.1 C63.1 C64.1 C65.1 C66.1 C67.1 C68.1 C69.1 C70.1 C71.1 C134.1 C135.1 L3.2 R36.1 R146.1 R149.1 U1.G6(NVCC_DRAM1) U1.H6(NVCC_DRAM2) U1.J6(NVCC_DRAM3) U1.K6(NVCC_DRAM4) U1.L6(NVCC_DRAM5) U1.M6(NVCC_DRAM6) U3.A1(VDDQ1) U3.A8(VDDQ2) U3.B2(VDD1) U3.C1(VDDQ3) U3.C9(VDDQ4) U3.D2(VDDQ5) U3.D9(VDD2) U3.E9(VDDQ6) U3.F1(VDDQ7) U3.G7(VDD3) U3.H2(VDDQ8) U3.H9(VDDQ9) U3.K2(VDD4) U3.K8(VDD5) U3.N1(VDD6) U3.N9(VDD7) U3.R1(VDD8) U3.R9(VDD9) U13.5(OUT)
DRAM_ADDR0: U1.L5(DRAM_ADDR00) U3.N3(A0)
DRAM_ADDR1: U1.H2(DRAM_ADDR01) U3.P7(A1)
DRAM_ADDR2: U1.K1(DRAM_ADDR02) U3.P3(A2)
DRAM_ADDR3: U1.M2(DRAM_ADDR03) U3.N2(A3)
DRAM_ADDR4: U1.K4(DRAM_ADDR04) U3.P8(A4)
DRAM_ADDR5: U1.L1(DRAM_ADDR05) U3.P2(A5)
DRAM_ADDR6: U1.G2(DRAM_ADDR06) U3.R8(A6)
DRAM_ADDR7: U1.H4(DRAM_ADDR07) U3.R2(A7)
DRAM_ADDR8: U1.J4(DRAM_ADDR08) U3.T8(A8)
DRAM_ADDR9: U1.L2(DRAM_ADDR09) U3.R3(A9)
DRAM_ADDR10: U1.M4(DRAM_ADDR10) U3.L7(A10/AP)
DRAM_ADDR11: U1.K3(DRAM_ADDR11) U3.R7(A11)
DRAM_ADDR12: U1.L4(DRAM_ADDR12) U3.N7(A12/B\C\)
DRAM_ADDR13: U1.H3(DRAM_ADDR13) U3.T3(A13)
DRAM_ADDR14: U1.G1(DRAM_ADDR14) U3.T7(A14)
DRAM_ADDR15: U1.K5(DRAM_ADDR15) U3.M7(NC_M7)
DRAM_CAS_B: U1.J2(D\R\A\M\_\C\A\S\) U3.K3(C\A\S\)
DRAM_CS0_B: U1.N2(D\R\A\M\_\C\S\0\) U3.L2(C\S\)
DRAM_CS1_B: U1.H5(D\R\A\M\_\C\S\1\) U3.L1(NC_L1)
DRAM_DATA0: U1.T4(DRAM_DATA00) U3.H7(DQ7)
DRAM_DATA1: U1.U6(DRAM_DATA01) U3.E3(DQ0)
DRAM_DATA2: U1.T6(DRAM_DATA02) U3.F2(DQ2)
DRAM_DATA3: U1.U7(DRAM_DATA03) U3.H8(DQ5)
DRAM_DATA4: U1.U8(DRAM_DATA04) U3.F7(DQ1)
DRAM_DATA5: U1.T8(DRAM_DATA05) U3.F8(DQ3)
DRAM_DATA6: U1.T5(DRAM_DATA06) U3.G2(DQ6)
DRAM_DATA7: U1.U4(DRAM_DATA07) U3.H3(DQ4)
DRAM_DATA8: U1.U2(DRAM_DATA08) U3.D7(DQ8)
DRAM_DATA9: U1.U3(DRAM_DATA09) U3.A7(DQ12)
DRAM_DATA10: U1.U5(DRAM_DATA10) U3.B8(DQ14)
DRAM_DATA11: U1.R4(DRAM_DATA11) U3.A3(DQ15)
DRAM_DATA12: U1.P5(DRAM_DATA12) U3.C8(DQ10)
DRAM_DATA13: U1.P3(DRAM_DATA13) U3.C2(DQ11)
DRAM_DATA14: U1.R2(DRAM_DATA14) U3.C3(DQ9)
DRAM_DATA15: U1.R1(DRAM_DATA15) U3.A2(DQ13)
DRAM_DQM0: U1.T7(DRAM_DQM0) U3.E7(LDM)
DRAM_DQM1: U1.T3(DRAM_DQM1) U3.D3(UDM)
DRAM_ODT0: U1.N1(DRAM_ODT0) U3.K1(ODT)
DRAM_ODT1: U1.F1(DRAM_ODT1) U3.J1(NC_J1)
DRAM_RAS_B: U1.M5(D\R\A\M\_\R\A\S\) U3.J3(R\A\S\)
DRAM_RESET_B: R33.2 U1.G4(DRAM_RESET) U3.T2(R\E\S\E\T\)
DRAM_SDBA0: U1.M1(DRAM_SDBA0) U3.M2(BA0)
DRAM_SDBA1: U1.H1(DRAM_SDBA1) U3.N8(BA1)
DRAM_SDBA2: U1.K2(DRAM_SDBA2) U3.M3(BA2)
DRAM_SDCKE0: R30.1 U1.M3(DRAM_SDCKE0) U3.K9(CKE)
DRAM_SDCKE1: R29.1 U1.J3(DRAM_SDCKE1) U3.J9(NC_J9)
DRAM_SDCLK0_N: R35.2 U1.P2(DRAM_SDCLK0_N) U3.K7(C\K\)
DRAM_SDCLK0_P: R35.1 U1.P1(DRAM_SDCLK0_P) U3.J7(CK)
DRAM_SDQS0_N: C72.2 U1.P7(DRAM_SDQS0_N) U3.G3(L\D\Q\S\)
DRAM_SDQS0_P: C72.1 U1.P6(DRAM_SDQS0_P) U3.F3(LDQS)
DRAM_SDQS1_N: C75.2 U1.T2(DRAM_SDQS1_N) U3.B7(U\D\Q\S\)
DRAM_SDQS1_P: C75.1 U1.T1(DRAM_SDQS1_P) U3.C7(UDQS)
DRAM_SDWE_B: U1.J1(D\R\A\M\_\S\D\W\E\) U3.L3(W\E\)
DRAM_VREF: C47.1 C48.1 C50.1 C70.2 C74.1 R36.2 R37.1 U1.P4(DRAM_VREF) U3.H1(VREFDQ) U3.M8(VREFCA)
DRAM_ZQ0: R31.2 U3.L8(ZQ)
DRAM_ZQ1: R32.1 U3.L9(NC_L9)
ECSPI4_MISO: C40.1 J1.105 R13.2
ECSPI4_MOSI: J1.121 U1.B15(ENET2_TX_EN)
ECSPI4_SCLK: J1.119 U1.A16(ENET2_TX_DATA1)
ECSPI4_SS0: J1.109 U1.D16(ENET2_RX_ER)
EMMC_VDDIM: C87.1 C88.1 U4.C2(VDDIM)
ENET1_CRS_DV: J1.101 U1.E16(ENET1_RX_EN)
ENET1_NINT: J1.12 U1.N8(SNVS_TAMPER5)
ENET1_RXD0: J1.97 U1.F16(ENET1_RX_DATA0)
ENET1_RXD1: J1.99 U1.E17(ENET1_RX_DATA1)
ENET1_RXER: J1.126 U1.D15(ENET1_RX_ER)
ENET1_TX_CLK: C34.2 J1.118 R12.2
ENET1_TXD0: J1.122 U1.E15(ENET1_TX_DATA0)
ENET1_TXD1: J1.124 U1.E14(ENET1_TX_DATA1)
ENET1_TXEN: J1.114 U1.F15(ENET1_TX_EN)
ENET2_CRS_DV: J1.117 U1.B17(ENET2_RX_EN)
ENET2_NINT: J1.42 U1.N11(SNVS_TAMPER6)
ENET2_RXD0: J1.111 U1.C17(ENET2_RX_DATA0)
ENET2_RXD1: J1.113 U1.C16(ENET2_RX_DATA1)
ENET2_TXD0: J1.123 U1.A15(ENET2_TX_DATA0)
ENET_MDC: J1.53 U1.L16(GPIO1_IO07)
ENET_MDIO: J1.61 U1.K17(GPIO1_IO06)
GPIO_DVFS: J1.34 Q4.2(GATE) R131.1 U1.P10(SNVS_TAMPER3)
HDMI_INT: J1.66 U1.K15(U\A\R\T\1\_\C\T\S\)
I2C1_SCL: J1.75 U1.G17(UART4_TX_DATA)
I2C1_SDA: J1.77 U1.G16(UART4_RX_DATA)
I2C2_SCL: J1.79 U1.F17(UART5_TX_DATA)
I2C2_SDA: J1.68 U1.G13(UART5_RX_DATA)
JTAG_MOD: J1.33 R19.1 U1.P15(JTAG_MOD)
JTAG_NTRST: J1.48 U1.N14(J\T\A\G\_\T\R\S\T\)
JTAG_TCK: J1.54 R14.1 U1.M14(JTAG_TCK)
JTAG_TDI: J1.43 U1.N16(JTAG_TDI)
JTAG_TDO: J1.52 U1.N15(JTAG_TDO)
JTAG_TMS: J1.46 U1.P14(JTAG_TMS)
LCD_DATA0: J1.153 R82.1 R91.2 U1.B9(LCD_DATA00)
LCD_DATA1: J1.155 R81.1 R92.2 U1.A9(LCD_DATA01)
LCD_DATA2: J1.164 R80.1 R93.2 U1.E10(LCD_DATA02)
LCD_DATA3: J1.154 R79.1 R94.2 U1.D10(LCD_DATA03)
LCD_DATA4: J1.158 R78.1 R95.2 U1.C10(LCD_DATA04)
LCD_DATA5: J1.149 R77.1 R96.2 U1.B10(LCD_DATA05)
LCD_DATA6: J1.151 R76.1 R97.2 U1.A10(LCD_DATA06)
LCD_DATA7: J1.166 R75.1 R98.2 U1.D11(LCD_DATA07)
LCD_DATA8: J1.143 R74.1 R99.2 U1.B11(LCD_DATA08)
LCD_DATA9: J1.145 R73.1 R100.2 U1.A11(LCD_DATA09)
LCD_DATA10: J1.152 R72.1 R101.2 U1.E12(LCD_DATA10)
LCD_DATA11: J1.148 R71.1 R102.2 U1.D12(LCD_DATA11)
LCD_DATA12: J1.150 R70.1 R103.2 U1.C12(LCD_DATA12)
LCD_DATA13: J1.139 R69.1 R104.2 U1.B12(LCD_DATA13)
LCD_DATA14: J1.141 R68.1 R105.2 U1.A12(LCD_DATA14)
LCD_DATA15: J1.142 R67.1 R106.2 U1.D13(LCD_DATA15)
LCD_DATA16: J1.144 R66.1 R107.2 U1.C13(LCD_DATA16)
LCD_DATA17: J1.133 R65.1 R108.2 U1.B13(LCD_DATA17)
LCD_DATA18: J1.137 R64.1 R109.2 U1.A13(LCD_DATA18)
LCD_DATA19: J1.138 R63.1 R110.2 U1.D14(LCD_DATA19)
LCD_DATA20: J1.140 R62.1 R111.2 U1.C14(LCD_DATA20)
LCD_DATA21: J1.129 R61.1 R112.2 U1.B14(LCD_DATA21)
LCD_DATA22: J1.131 R60.1 R113.2 U1.A14(LCD_DATA22)
LCD_DATA23: J1.134 R59.1 R114.2 U1.B16(LCD_DATA23)
LCD_DE: J1.163 U1.B8(LCD_ENABLE)
LCD_DISP: J1.10 U1.R6(SNVS_TAMPER9)
LCD_HSYNC: J1.160 U1.D9(LCD_HSYNC)
LCD_PCLK: C20.2 J1.161 R4.2
LCD_RST: J1.157 R7.2
LCD_VSYNC: J1.162 U1.C9(LCD_VSYNC)
MX6_POR_B: J1.4 R143.1
NUSB_OTG_CHD: J1.31 U1.U16(U\S\B\_\O\T\G\1\_\C\H\D\)
NWDOG: C130.1 R2.2
ONOFF: J1.14 U1.R8(ONOFF)
OSC_CLK: C46.1 R20.1 R21.2 Y1.1
PERI_PWREN: J1.44 U1.P11(SNVS_TAMPER2)
PMIC_ON_REQ: J1.5 Q6.2(GATE) R136.2 U1.T9(SNVS_PMIC_ON_REQ)
PMIC_STBY_REQ: J1.3 Q1.2(GATE) Q2.2(GATE) R130.1 U1.U9(CCM_PMIC_STBY_REQ)
POR_B: C42.1 J1.16 R17.2 R18.2 U1.P8(P\O\R\)
RTC_XTALI: C44.1 U1.T11(RTC_XTALI) Y2.1
RTC_XTALO: C45.1 U1.U11(RTC_XTALO) Y2.2
SD1_CD: J1.74 U1.J14(U\A\R\T\1\_\R\T\S\)
SD1_CLK: C31.2 J1.179 R11.2
SD1_CMD: J1.173 R9.2 U1.C2(SD1_CMD)
SD1_DATA0: J1.167 R10.2 U1.B3(SD1_DATA0)
SD1_DATA1: J1.171 U1.B2(SD1_DATA1)
SD1_DATA2: J1.175 U1.B1(SD1_DATA2)
SD1_DATA3: J1.169 U1.A2(SD1_DATA3)
SD1_NRST: J1.56 U1.M15(GPIO1_IO09)
SD1_VSELECT: J1.49 U1.M17(GPIO1_IO05)
SD2_CLK: C22.2 R6.2 U4.M6(CLK)
SD2_CMD: R3.2 U4.M5(CMD)
SD2_DATA0: U1.D7(NAND_DATA00) U4.A3(DAT0)
SD2_DATA1: U1.B7(NAND_DATA01) U4.A4(DAT1)
SD2_DATA2: U1.A7(NAND_DATA02) U4.A5(DAT2)
SD2_DATA3: U1.D6(NAND_DATA03) U4.B2(DAT3)
SD2_DATA4: U1.C6(NAND_DATA04) U4.B3(DAT4)
SD2_DATA5: U1.B6(NAND_DATA05) U4.B4(DAT5)
SD2_DATA6: U1.A6(NAND_DATA06) U4.B5(DAT6)
SD2_DATA7: U1.A5(NAND_DATA07) U4.B6(DAT7)
SD2_NRST: R5.2 R38.1 U4.K5(R\S\T\)
SHIFT_NOE: J1.18 U1.N9(SNVS_TAMPER8)
SHIFT_SDI: J1.9 R84.1 U1.T10(BOOT_MODE0)
SHIFT_SHCP: J1.7 R83.1 U1.U10(BOOT_MODE1)
SHIFT_STCP: J1.24 U1.N10(SNVS_TAMPER7)
UART1_RXD: J1.63 U1.K16(UART1_RX_DATA)
UART1_TXD: J1.57 U1.K14(UART1_TX_DATA)
UART2_CTS_BB: J1.69 U1.H17(UART3_TX_DATA)
UART2_RTS_BB: J1.73 U1.H16(UART3_RX_DATA)
UART2_RXD: J1.67 U1.J16(UART2_RX_DATA)
UART2_TXD: J1.65 U1.J17(UART2_TX_DATA)
USB_OTG1_DN: J1.27 U1.T15(USB_OTG1_DN)
USB_OTG1_DP: J1.25 U1.U15(USB_OTG1_DP)
USB_OTG1_ID: J1.64 U1.K13(GPIO1_IO00)
USB_OTG1_OC: J1.62 U1.L15(GPIO1_IO01)
USB_OTG1_PWR: J1.47 U1.M16(GPIO1_IO04)
USB_OTG1_VBUS: C26.1 C152.1 J1.13 U1.T12(USB_OTG1_VBUS)
USB_OTG2_DN: J1.21 U1.T13(USB_OTG2_DN)
USB_OTG2_DP: J1.19 U1.U13(USB_OTG2_DP)
USB_OTG2_OC: J1.55 U1.L17(GPIO1_IO03)
USB_OTG2_PWR: J1.58 U1.L14(GPIO1_IO02)
USB_OTG2_VBUS: C29.1 C154.1 J1.11 U1.U12(USB_OTG2_VBUS)
VSYS: C96.1 C97.1 C99.1 C103.1 C104.1 C107.1 C108.1 C109.1 C112.1 C113.1 C131.1 C132.1 C133.1 C144.1 C145.1 C146.1 J1.96 J1.98 J1.100 J1.102 J1.104 J1.106 J1.108 J1.110 J1.112 R133.1 U7.2(VIN) U8.3(VIN) U9.2(VIN) U10.1(VIN) U13.2(VIN)
XTAL_CMPT: R27.1 R28.1 Y1.2(GND1)
XTALI: C43.1 R21.1 R24.1 R25.1 U1.T16(XTALI)
XTALO: R20.2 R22.2 U1.T17(XTALO)
ZQPAD: R34.2 U1.N4(DRAM_ZQPAD)
N34400: C16.1 U1.P13(NVCC_PLL)
N275143: C18.1 U1.N12(VDD_SNVS_CAP)
N296357: C28.1 U1.R12(VDD_USB_CAP)
N299288: R4.1 U1.A8(LCD_CLK)
N299296: R2.1 R7.1 U1.E9(LCD_RESET)
N300247: C33.2 R12.1 U1.F14(ENET1_TX_CLK)
N300263: C39.1 R13.1 U1.D17(ENET2_TX_CLK)
N300588: R5.1 U1.B4(NAND_ALE)
N300600: C21.2 R6.1 U1.D8(N\A\N\D\_\R\E\)
N300873: R3.1 U1.C8(N\A\N\D\_\W\E\)
N309462: R25.2 R26.2 Y1.3
N469761: TP19.1(TP) U13.1(PG)
N470472: R146.2 R151.1 U13.7(FB)
N470614: L3.1 U13.3(SW)
N475908: Q2.1(SOURCE) Q4.1(SOURCE) R120.2 R129.1 U7.7(FB)
N476046: L1.1 U7.3(SW)
N476909: Q2.3(DRAIN) R121.2
N477774: Q4.3(DRAIN) R122.2
N482885: R140.1 U9.1(PG)
N483005: R134.2 R138.1 U9.7(FB)
N483147: L2.1 U9.3(SW)
N535963: C117.1 U10.4(BP)
N549057: C116.1 R133.2 R136.1 R141.2 U9.8(EN) U11.2(R\E\S\E\T\)
N560035: C140.1 R150.1 U13.8(EN)
N563402: C101.1 R127.1 U7.8(EN)
N98008264: C30.2 R11.1 U1.C1(SD1_CLK)
N98468969: Q6.3(DRAIN) R137.2 R139.2
N98472195: Q5.3(DRAIN) R135.2
N98472663: Q8.3(DRAIN) R149.2
N98473370: Q3.3(DRAIN) R124.2
N98645062: C41.1 R15.2 R16.1 U2.3(VCC)
N98645064: R16.2 R17.1 U2.2(R\E\S\E\T\)
N98716241: C122.1 D3.1 R143.2
N98716244: D3.2 D5.2 R141.1 U11.3(M\R\)
N98738134: C130.2 D5.1 R144.1
N99172123: Q1.3(DRAIN) R23.2 R26.1

Pads without a net: J1 83 86 94 95; U1 A3 A4 B5 C5 D5 E6 R13; U4 A1 A2 A6 A7 A8 A9 A10 A11 A12 A13 A14 B1 B7 B8 B9 B10 B11 B12 B13 B14 C1 C3 C5 C7 C8 C9 C10 C11 C12 C13 C14 D1 D2 D3 D4 D12 D13 D14 E1 E2 E3 E5 E8 E9 E10 E12 E13 E14 F1 F2 F3 F10 F12 F13 F14 G1 G2 G3 G10 G12 G13 G14 H1 H2 H3 H5 H12 H13 H14 J1 J2 J3 J5 J12 J13 J14 K1 K2 K3 K6 K7 K10 K12 K13 K14 L1 L2 L3 L12 L13 L14 M1 M2 M3 M7 M8 M9 M10 M11 M12 M13 M14 N1 N3 N6 N7 N8 N9 N10 N11 N12 N13 N14 P1 P2 P7 P8 P9 P10 P11 P12 P13 P14

## Via types
v1: diameter 0.406, hole 0.203, TOP to BOTTOM, 609 vias

## Routing (per net, layer and track width the routed paths; a pad name or vN(x,y) marks a point on that pad's centre or on a via; arc(x,y) is an arc through that point)
GND: length 337.1
  TOP w0.076: 23.82,16.18 24.12,16.49 24.12,16.87 U4.N2
  TOP w0.132: v1(23.66,16.06) 23.69,16.06 23.82,16.18
  TOP w0.203: v1(24.93,19.49) 24.74,19.49 U4.P6 U4.N5 U4.P4 24.53,17.96 v1(24.93,17.96) ; v1(19.34,18.6) 18.87,18.13 U4.C4 ; U4.H10 21.37,20.88 v1(21.12,20.63)
  TOP w0.381: U1.F9 v1(41.31,24.2) 41.71,24.6 U1.F10 v1(41.31,25) ; C101.2 26.33,9.71 v1(26.71,9.33) 26.2,8.82 R129.2 ; U1.R11 v1(49.31,25.01) ; Q3.1 27.01,8.23 v1(26.58,7.8) C102.2 ; C100.2 24.93,5.64 v1(24.81,5.52) v1(23.92,5.52) ; v1(27.45,38.11) 27.6,38.11 27.66,38.16 J1.115 ; U3.P9 v1(57.23,3.64) ; v1(47.03,38.16) 46.86,38.33 J1.51 ; v1(18.05,38.16) 18.06,38.16 J1.147 ; v1(7.79,22.28) 7.26,22.28 6.88,21.9 U9.6 ; v1(62.78,30.79) C154.2 C152.2 ; J1.1 65.45,38.16 v1(65.45,38.16) ; R22.1 v1(49.7,33.46) 49.93,33.69 C46.2 ; J1.177 v1(9.06,38.16) ; C30.1 v1(35.22,13.39) ; C106.2 v1(5.88,14.41) ; U1.R5 v1(49.31,20.21) ; U1.G15 v1(42.11,29) ; U1.R17 48.91,30.2 v1(49.31,29.8) U1.R16 ; v1(30.27,38.16) 30.06,38.37 J1.107 ; C29.2 55.59,26.14 v1(56.05,26.6) 55.74,26.9 C26.2 ; R144.2 v1(10.33,11.1) 10.45,11.23 C122.2 ; 51.57,7.6 v1(51.01,7.6) ; C123.2 12.79,25.13 v1(12.87,25.2) ; J1.189 5.46,38.16 v1(5.45,38.16) ; U1.J7 44.11,22.2 v1(43.71,21.81) U1.H7 ; J1.15 61.25,38.41 v1(61,38.16) 60.66,38.5 J1.17 ; v1(14.26,38.16) 14.46,38.35 J1.159 ; 56.1,10.99 v1(55.53,10.99) ; 64.58,11.56 v1(65.15,11.56) ; J1.23 58.85,38.6 v1(58.38,38.13) ; U3.D8 v1(62.89,10.43) ; R131.2 v1(30.9,3.61) ; J1.127 24.06,38.52 v1(24.42,38.16) 24.66,38.39 J1.125 ; C105.2 v1(5.88,13.64) 6.07,13.45 U8.1 ; 46.52,23.8 v1(46.91,24.2) 46.52,24.6 46.51,24.6 U1.M10 U1.M11 ; 46.52,23.8 v1(46.91,23.41) 46.51,23 U1.M8 U1.M7 46.51,22.2 v1(46.91,21.81) U1.N7 ; 46.52,23.8 U1.M9 ; v1(41.7,5.64) C134.2 42.71,5.77 C135.2 ; J1.181 7.86,38.16 v1(7.85,38.16) ; U1.C15 v1(38.91,29) ; J1.29 57.06,38.27 v1(57.17,38.16) ; v1(47.71,20.21) 47.31,20.6 U1.N5 ; U1.U14 50.51,27.81 v1(50.11,28.2) U1.T14 ; C43.2 v1(53.63,33.46) ; U1.U1 v1(50.91,17.8) ; J1.71 40.86,38.23 v1(40.93,38.16) ; R27.2 55.79,37.52 v1(55.29,37.52) ; U4.K8 v1(22.9,20.12) ; v1(20.36,19.74) 20.24,19.62 U4.E7 ; v1(50.11,30.6) 50.51,30.21 U1.U17 ; v1(49.95,38.16) 49.86,38.25 J1.41 ; U1.F7 41.71,22.2 v1(42.11,22.6) U1.G7 ; v1(21.65,38.16) 21.66,38.16 J1.135 ; v1(21,18.09) 20.87,18.21 U4.G5 ; U3.B3 v1(60.62,13.82) ; v1(37.51,33.2) 37.51,33.33 38.27,34.09 C40.2 ; 56.1,3.08 v1(56.1,2.51) ; J1.59 44.46,38.25 v1(44.36,38.16) ; C42.2 v1(58.84,24.31) ; C39.2 v1(38.14,33.2) ; U3.E8 v1(62.32,9.86) ; 43.73,7.93 44.43,7.93 Q8.1 44.86,8.96 v1(44.62,9.2) ; U2.1 v1(62.84,24.89) ; U3.P1 v1(52.14,8.73) ; U1.A1 v1(37.31,17.01) ; U1.R3 v1(49.31,18.61) ; U1.F11 41.71,25.4 v1(41.31,25) ; v1(2.2,38.16) 2.46,38.41 J1.199 ; J1.81 37.86,38.16 v1(37.85,38.16) ; v1(12.65,38.16) 12.66,38.16 J1.165 ; U9.4 v1(6.23,22.92) ; Y1.4 v1(51.69,36.34) ; C150.2 34.46,34.47 v1(34.58,34.35) ; v1(55.25,38.16) 55.26,38.16 J1.35 ; J1.103 31.26,38.44 v1(31.54,38.16) ; U3.E1 v1(57.8,14.39) ; U1.M12 46.51,26.21 v1(46.11,26.6) U1.L12 U1.K12 ; v1(41.31,25) U1.E11 ; C44.2 54.52,23.37 v1(54.52,23.42) 55.01,23.91 C45.2 ; 59.49,15.52 v1(59.49,16.08) ; 60.62,8.73 v1(61.19,8.73) ; v1(48.63,13.44) 48.45,13.62 C50.2 ; v1(35.22,34.35) 35.22,34.85 35.47,35.11 36.24,35.11 ; U1.C11 v1(38.91,25.8) ; 64.02,10.99 v1(64.58,10.99) ; U1.C3 v1(38.91,18.61) ; C41.2 v1(62.78,21.77) ; U1.K7 v1(45.31,21.81) 45.31,21.81 U1.L7 ; U1.F8 v1(41.31,23.4) 40.91,23 U1.E8 ; 55.64,14.64 55.64,14.28 v1(56.66,13.26) 56.66,12.69 ; U1.N3 v1(46.91,18.61) ; U3.D1 v1(58.36,14.95) ; U1.A17 v1(37.31,29.81) ; R24.2 v1(54.52,33.46) ; J1.185 6.66,38.16 v1(6.65,38.16) ; U1.G3 v1(42.11,18.61) ; U1.J12 44.11,26.2 v1(43.71,25.8) 43.31,26.2 43.31,26.21 U1.H12 43.31,26.2 v1(42.91,25.8) 42.51,26.2 42.51,26.21 U1.G12 U1.F12 ; U1.J5 v1(43.71,20.21) ; 61.74,3.76 60.62,2.64 v1(60.62,2.22) ; U1.F6 v1(42.11,21) U1.G5 ; U1.L3 v1(45.31,18.61) ; v1(44.62,9.83) C140.2 R151.2 ; C31.1 v1(34.2,13.39) ; U13.6 v1(40.1,9.26) ; U1.C7 v1(38.91,21.81) ; 59.49,7.6 v1(59.49,7.04) ; C120.2 v1(10.12,24.36) ; U1.R7 v1(49.31,21.8) ; 61.76,8.73 v1(62.32,8.73) ; U3.M9 v1(58.36,4.78) ; 61.19,8.17 v1(61.76,8.17) ; U3.M1 v1(53.27,9.87) ; U3.E2 v1(58.36,13.82)
  BOTTOM w0.381: J1.82 37.56,38.45 v1(37.85,38.16) ; C87.2 v1(19.98,14.66) ; C83.2 19.09,18.34 v1(19.34,18.6) ; C14.2 R19.2 v1(49.7,33.46) ; 58.84,16.59 58.99,16.59 v1(59.49,16.08) ; C21.1 34.2,19.49 C1.2 32.43,19.36 v1(31.92,18.85) ; v1(43.71,21.81) 43.84,21.67 C10.2 ; v1(2.2,38.16) 2.16,38.2 J1.200 ; J1.128 23.76,38.82 v1(24.42,38.16) ; C85.2 25.69,19.49 v1(24.93,19.49) ; v1(57.17,38.16) 57.36,38.35 J1.28 ; 58.95,7.65 59.49,7.11 v1(59.49,7.04) ; v1(42.11,18.61) 42.11,17.8 R33.1 ; v1(15.15,38.16) 15.36,38.36 J1.156 ; R109.1 v1(22.14,33.96) ; v1(42.11,21) 40.69,21 C25.2 ; C78.2 21.12,17.96 v1(21,18.09) ; v1(42.11,22.6) 42.05,22.66 C55.2 41.32,23.4 v1(41.31,23.4) ; v1(21.65,38.16) 21.36,38.45 J1.136 ; v1(22.9,20.12) 22.9,20.12 23.28,20.12 C84.2 ; R98.1 v1(10.96,30.54) ; v1(23.66,16.06) 23.03,15.42 C159.2 ; v1(57.8,14.39) 57.24,14.94 57.21,14.94 ; R93.1 v1(11.98,33.96) ; 53.58,9.17 53.58,9.56 v1(53.27,9.87) 53.36,9.95 53.36,10.96 ; J1.180 8.16,38.46 v1(7.85,38.16) 7.56,38.45 J1.182 ; R105.1 v1(20.11,33.96) ; v1(21.12,20.63) 21,20.76 C80.2 ; C40.2 38.27,34.09 37.51,33.33 v1(37.51,33.2) ; C32.2 39.17,18.34 v1(38.91,18.61) ; v1(56.1,2.51) 56.43,2.19 C64.2 ; C20.1 C22.1 v1(35.98,22.15) ; v1(47.03,38.16) 47.16,38.28 J1.50 ; C86.2 25.44,17.96 v1(24.93,17.96) ; R14.2 v1(47.67,33.46) ; R34.1 46.91,18.34 v1(46.91,18.61) ; v1(6.65,38.16) 6.96,38.46 J1.184 ; 63.18,8.71 62.34,8.71 v1(62.32,8.73) ; C2.2 42.33,24.19 C4.2 41.42,24.31 v1(41.31,24.2) ; v1(56.66,13.26) 56.51,13.41 55.69,13.41 ; J1.60 44.16,38.36 v1(44.36,38.16) ; v1(20.36,19.74) 20.49,19.87 C77.2 ; C37.2 46.01,26.7 v1(46.11,26.6) 45.51,26.6 C35.2 C3.2 ; C49.2 50.33,21.26 49.79,21.8 v1(49.31,21.8) ; v1(46.91,24.2) 46.64,23.93 C9.2 C13.2 ; J1.2 65.15,38.45 v1(65.45,38.16) ; J1.40 53.75,38.45 v1(54.05,38.16) 54.05,38.37 54.36,38.67 J1.38 ; J1.176 9.36,38.46 v1(9.06,38.16) 8.76,38.46 J1.178 ; C142.2 v1(3.6,33.71) ; R106.1 v1(19.09,30.54) ; C8.2 43.03,20.88 v1(43.71,20.21) ; v1(34.58,34.35) 34.46,34.35 34.2,34.6 C146.2 ; 61.4,2.87 61.4,1.98 v1(61.13,1.71) ; C58.2 65.57,11.14 v1(65.15,11.56) ; C28.2 C16.2 51.22,27.87 v1(51.6,28.25) ; C60.2 57.7,3.18 v1(57.23,3.64) ; v1(27.45,38.11) 27.36,38.2 J1.116 ; R99.1 v1(19.09,33.96) ; v1(58.38,38.13) 57.96,38.56 J1.26 ; v1(5.88,16.44) 5.9,16.42 Q6.1 ; v1(49.31,25.01) 49.12,24.82 C18.2 ; C56.2 45.51,18.8 v1(45.31,18.61) ; v1(54.52,24.31) 54.5,24.34 C19.2 ; J1.172 10.56,38.46 v1(10.25,38.16) 9.96,38.45 J1.174 ; R30.2 v1(46.65,13.39) ; v1(46.91,21.81) 47.06,21.66 C57.2 ; v1(64.81,30.79) C156.2 C158.2 ; R94.1 v1(14.01,30.54) ; v1(61.76,8.17) 62.01,7.91 63.12,7.91 C51.2 ; R111.1 v1(20.11,30.54) ; 60.04,5.32 v1(60.62,5.9) ; R96.1 v1(17.06,33.96) ; R101.1 v1(15.03,30.54) ; C143.2 v1(4.36,33.71) ; R131.2 v1(30.9,3.61) ; R91.1 v1(15.03,33.96) ; J1.170 11.16,38.45 v1(11.45,38.16) 11.76,38.46 J1.168 ; R110.1 v1(21.12,30.54) ; R103.1 v1(16.04,30.54) ; R95.1 v1(14.01,33.96) ; 35.47,35.11 36.24,35.11 36.24,34.6 35.98,34.35 v1(35.85,34.35) ; v1(54.52,33.46) 54.43,33.36 Q1.1 ; R38.2 v1(21.88,14.66) ; v1(25.82,34.73) R112.1 R113.1 R108.1 ; C5.2 42.37,26.34 v1(42.91,25.8) ; J1.84 36.96,38.2 v1(37,38.16) ; 51.83,9.43 51.83,9.04 v1(52.14,8.73) ; R107.1 v1(18.07,30.54) ; J1.130 23.16,38.46 v1(22.85,38.16) 22.56,38.45 J1.132 ; v1(18.05,38.16) 18.36,38.46 J1.146 ; R104.1 v1(21.12,33.96) ; v1(59.73,1.58) 59.65,1.58 58.61,2.62 ; v1(40.93,38.16) 41.16,38.38 J1.70 ; J1.22 59.15,38.48 v1(59.48,38.16) 59.75,38.43 J1.20 ; J1.120 26.16,38.45 v1(26.45,38.16) ; R100.1 v1(18.07,33.96) ; R102.1 v1(17.06,30.54) ; R29.2 v1(44.64,13.31) ; R97.1 v1(16.04,33.96) ; C23.2 40.62,24.31 v1(41.31,25) 41.32,25.01 41.32,25.71 ; C88.2 v1(20.87,14.66) ; R92.1 v1(11.98,30.54) ; R114.1 v1(22.14,30.54) ; C39.2 v1(38.14,33.2)
  vias: v1(0.93,33.71) v1(0.93,29.9) v1(0.93,26.09) v1(1.31,1.58) v1(1.56,5.64) v1(1.56,5.01) v1(1.69,9.45) v1(2.07,15.42) v1(2.07,12.25) v1(2.2,5.64) v1(2.2,5.01) v1(2.33,9.45) v1(4.61,1.58) v1(5.27,18.85) v1(5.27,18.24) v1(5.88,18.85) v1(5.91,18.22) v1(5.91,17.56) v1(7.28,5.39) v1(7.91,5.39) v1(8.42,1.58) v1(8.55,5.39) v1(9.18,5.39) v1(9.31,22.41) v1(9.31,21.65) v1(9.31,20.88) v1(12.23,1.58) v1(15.15,8.18) v1(15.79,8.18) v1(16.04,1.58) v1(16.68,23.3) v1(18.96,8.18) v1(19.6,8.18) v1(19.85,1.58) v1(22.52,9.45) v1(32.93,8.18) v1(33.57,8.18) v1(35.85,12.5) v1(36.62,8.31) v1(37.25,8.31) v1(62.78,1.2) v1(63.67,4.75) v1(65.7,6.66) v1(65.7,3.99) v1(65.7,1.2)
VDD_ARM_CAP: length 4.7
  TOP w0.381: v1(42.91,25) 42.51,25.4 U1.G11 ; v1(42.91,25) 42.51,24.6 U1.G10 U1.G9 42.51,23.8 v1(42.91,23.4) ; v1(42.91,25) 43.31,25.4 U1.H11
  BOTTOM w0.381: v1(42.91,25) 42.58,25.33 C5.1 ; C4.1 42.8,23.3 v1(42.91,23.4)
VDD_ARM_SOC_IN: length 11.9
  TOP w0.381: U1.J9 U1.H10 v1(43.71,25) 44.11,24.6 U1.J10 ; U1.J9 U1.K10 ; U1.J9 44.11,23.8 v1(43.71,23.41) U1.H9 ; U1.J9 v1(44.51,23.41) 44.91,23.8 U1.K9 ; U7.5 23.45,6.83
  BOTTOM w0.381: C2.1 44.62,23.52 v1(44.51,23.41) ; C1.1 35.6,17.84 v1(36.74,18.98) ; v1(43.71,25) 44.29,25.58 C3.1
  vias: v1(25.31,2.47) v1(25.31,1.83) v1(25.95,2.47) v1(25.95,1.83) v1(26.58,2.47) v1(26.58,1.83)
VDD_COIN_3V: length 26.1
  BOTTOM w0.305: J1.8 63.36,33.26 C158.1 63.54,32.06 63.54,30.15 64.81,28.88 64.81,27.23 63.67,26.09 55.69,26.09 R1.1 54.92,26.87 D2.2
VDD_HIGH_CAP: length 18.1
  TOP w0.132: v1(49.31,29) U1.R15 U1.R14 ; U1.N6 v1(47.71,21.01)
  ART03 w0.132: v1(49.31,29) 48.94,28.63 46.65,28.63 46.52,28.5 46.52,22.92 47.28,22.15 47.28,21.43 v1(47.71,21.01)
  BOTTOM w0.132: C49.1 49.04,21.42 48.12,21.42 ; v1(49.31,29) 49.44,29 50.59,30.15 C14.1
  BOTTOM w0.135: 48.12,21.42 v1(47.71,21.01)
VDD_SNVS_3V3: length 94.9
  TOP w0.381: C123.1 12.82,26.14 v1(12.87,26.09) 13.5,25.46 13.5,18.32 U11.4 13.38,15.82 13.38,14.41 v1(12.61,13.64) ; v1(4.1,15.17) C106.1 C105.1 4.17,13.58 U8.2
  ART03 w0.305: v1(12.87,26.09) 12.87,27.08 10.07,29.88 10.07,35.87 11.22,37.01 26.58,37.01 28.23,35.36 51.48,35.36 v1(51.73,35.62)
  BOTTOM w0.305: D1.2 52.85,34.5 v1(51.73,35.62) ; v1(12.61,13.64) 11.09,15.17 v1(4.1,15.17) 2.71,16.57 2.71,18.22 R137.1
